# Altium PCB PCB1.PcbDoc (part 2 of 2)
Units mm, origin at the board's own origin, x right, y up, seen from the top; angles counter-clockwise.
Board outline 22.86 x 46 mm, 4 copper layers (Top Layer (sig), Plane (gnd), Plane2 (gnd), Bottom Layer (sig)), stack 0.603 mm thick; 57 components, 57 nets, 281 pads, 103 vias.
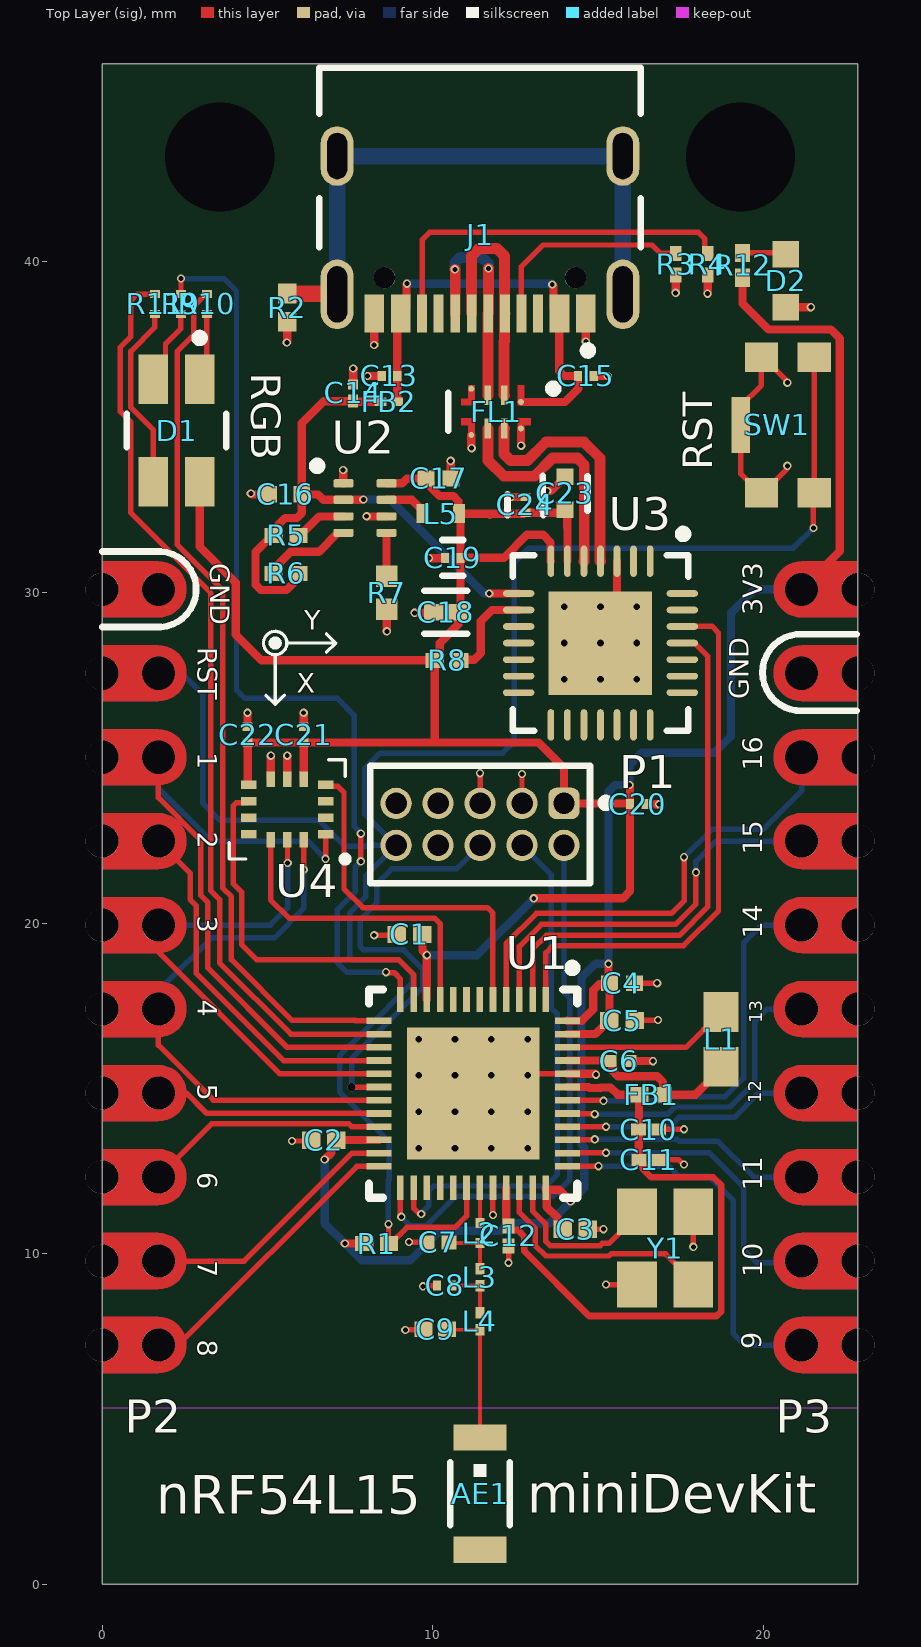
[diagram p0: Top Layer (sig) view]

## Via types
v1: diameter 0.25, hole 0.15, Top Layer (sig) to Bottom Layer (sig), tented both sides, 72 vias
v2: diameter 0.5, hole 0.2, Top Layer (sig) to Bottom Layer (sig), 25 vias
v3: diameter 0.25, hole 0.15, Top Layer (sig) to Bottom Layer (sig), 5 vias
v4: diameter 0.25, hole 0.25, Top Layer (sig) to Bottom Layer (sig), tented both sides, 1 vias

## Nets (pads, with @x,y where several pads share a name; then routed paths per layer and width w, separated by ;. In a path a pad name is that pad's centre, name@x,y a point inside that pad or via, vN(x,y) a via of type N, cw(c..) or ccw(c..) an arc to the next point about the centre after c; other vN are vias at no path point) (continued)
UART_TX: (continued)
  Top Layer (sig) w0.165: U1.1 13.422,19.101 13.64,19.319 17.592,19.319 18.644,20.371 18.644,28.778 18.44,28.981 18.272,28.981 18.27,28.98 17.555,28.98 U3.26
USB_D_N: FL1.2 J1.A7 J1.B7 | length 7.2
  Top Layer (sig) w0.33: J1.A7 11.176,38.451 11.176,40.183 11.405,40.411 11.938,40.411 12.167,40.183 12.167,39.178 12.165,39.176 12.165,38.462 J1.B7 12.165,38.432 12.165,37.599 12.158,37.592 12.158,35.975 FL1.2
USB_D_P: FL1.3 J1.A6 J1.B6 | length 6.7
  Top Layer (sig) w0.33: v1(10.668,39.776) 10.68,39.764 J1.B6 ; FL1.3 11.675,35.975 11.675,38.442 J1.A6 11.682,38.449 11.682,39.8 v1(11.684,39.802)
  Bottom Layer (sig) w0.33: v1(10.668,39.776) 10.668,39.989 10.819,40.14 11.49,40.14 11.684,39.946 v1(11.684,39.802)
USBD_N: FL1.6 U3.5 | length 7.3
  Top Layer (sig) w0.33: FL1.6 11.675,34.958 11.675,33.994 12.152,33.517 13.072,33.517 13.619,34.065 14.381,34.065 14.582,33.863 14.582,30.957 U3.5
USBD_P: FL1.7 U3.4 | length 7.3
  Top Layer (sig) w0.33: FL1.7 12.158,34.958 12.158,34.194 12.352,34 12.872,34 13.419,34.548 14.581,34.548 15.065,34.063 15.065,30.957 U3.4
V_USB: C14.1 C16.1 FB2.2 R5.1 R6.1 U2.2 U3.8 | length 17.9
  Top Layer (sig) w0.165: FB2.2@8.408,35.78 FB2.2
  Top Layer (sig) w0.25: R5.1 5.141,31.731 4.637,31.227 4.637,30.238 4.798,30.077 5.576,30.077 5.787,30.288 5.787,30.477 5.887,30.577 R6.1 ; R5.1@5.241,31.731 5.341,31.831 5.341,32.062 5.537,32.258 5.893,32.258 6.041,32.406 C16.1 ; v1(7.899,32.817) 7.887,32.804 U2.2 6.693,32.804 6.53,32.967 C16.1 ; FB2.2 8.413,35.775 7.604,35.775 7.591,35.789 6.706,35.789 6.041,35.124 C16.1 ; v1(11.709,29.972) U3.8 U3.8
  Bottom Layer (sig) w0.25: v1(7.899,32.817) 8.712,32.817 11.557,29.972 v1(11.709,29.972)
VBUS: C13.1 C15.1 FB2.1 FL1.1 J1.A4-B9 J1.B4-A9 | length 13.7
  Top Layer (sig) w0.25: FB2.1 8.929,35.77 C13.1 8.929,38.346 J1.B4-A9 9.205,38.622 9.205,39.329 v1(9.22,39.345) ; FL1.1 13.999,35.766 14.402,36.17 14.394,36.177 C15.1 13.976,36.553 13.83,36.699 J1.A4-B9 13.655,38.622 13.655,39.279 v1(13.614,39.319)
  Bottom Layer (sig) w0.25: v1(9.22,39.345) 10.477,39.345 10.486,39.336 10.85,39.336 10.859,39.345 13.589,39.345 v1(13.614,39.319)
pads on no net: AE1.2 FL1.4 J1. J1.A8 J1.B8 P1.7 P1.8 P2. P3. U1.6 U1.7 U1.8 U1.27 U1.28 U1.29 U3.1 U3.2 U3.10 U3.11 U3.12 U3.13 U3.14 U3.15 U3.16 U3.17 U3.18 U3.19 U3.20 U3.21 U3.22 U3.23 U3.24 U3.27 U3.28 U4.2 U4.3 U4.10 U4.11

## Polygon pours and split planes (outlines as drawn)
GND on Plane (gnd) (split plane): 22.35,0.51 0.51,0.51 0.51,45.489 22.35,45.489
GND on Plane2 (gnd) (split plane): 22.35,0.51 0.51,0.51 0.51,45.489 22.35,45.489

## Keep-outs
Keep-Out Layer:
  rectangle: 0,0 22.86,5.334

## Silkscreen, mask and mechanical layers (free items; w line width, h text height)
Top Overlay:
  circle w0.2: c5.234,28.473 r0.1
  circle w0.1: c5.234,28.473 r0.353
  lines w0.1: 4.955,26.899 5.234,26.619 ; 5.234,26.645 5.234,26.619 ; 5.234,28.067 5.234,26.619 ; 5.513,26.899 5.234,26.619 ; 5.615,28.473 7.063,28.473 ; 6.783,28.194 7.063,28.473 ; 6.783,28.753 7.063,28.473
  lines w0.2: 0.002,28.958 1.778,28.958 ccw(c1.7,30.099) 1.778,31.24 0.002,31.24 ; 22.817,26.424 21.184,26.424 cw(c21.135,27.584) 21.179,28.745 22.817,28.745
  text "RGB" at 4.205,36.652 h1.52 r270
  text "RST" at 18.757,33.706 h1.52 r90
  text "GND" at 3.275,30.888 h0.6 r270
  text "3V3" at 19.966,29.31 h0.6 r90
  text "Y" at 6.12,28.878 h0.6
  text "RST" at 2.894,28.348 h0.6 r270
  text "X" at 5.891,26.973 h0.6
  text "GND" at 19.56,26.77 h0.6 r90
  text "1" at 2.894,25.173 h0.6 r270
  text "16" at 19.966,24.611 h0.6 r90
  text "2" at 2.894,22.76 h0.6 r270
  text "15" at 19.966,22.071 h0.6 r90
  text "3" at 2.894,20.22 h0.6 r270
  text "14" at 19.966,19.531 h0.6 r90
  text "4" at 2.894,17.68 h0.6 r270
  text "13" at 19.966,16.966 h0.4 r90
  text "5" at 2.894,15.14 h0.6 r270
  text "12" at 19.941,14.553 h0.4 r90
  text "6" at 2.894,12.473 h0.6 r270
  text "11" at 19.966,11.911 h0.6 r90
  text "7" at 2.894,9.806 h0.6 r270
  text "10" at 19.966,9.295 h0.6 r90
  text "8" at 2.894,7.393 h0.6 r270
  text "9" at 19.941,7.11 h0.6 r90
  text "miniDevKit" at 12.852,1.775 h2
  text "nRF54L15" at 1.643,1.744 h2
Mechanical 1:
  the board outline again, w0.1